# EAGLE board main (EAGLE 6.5.0)
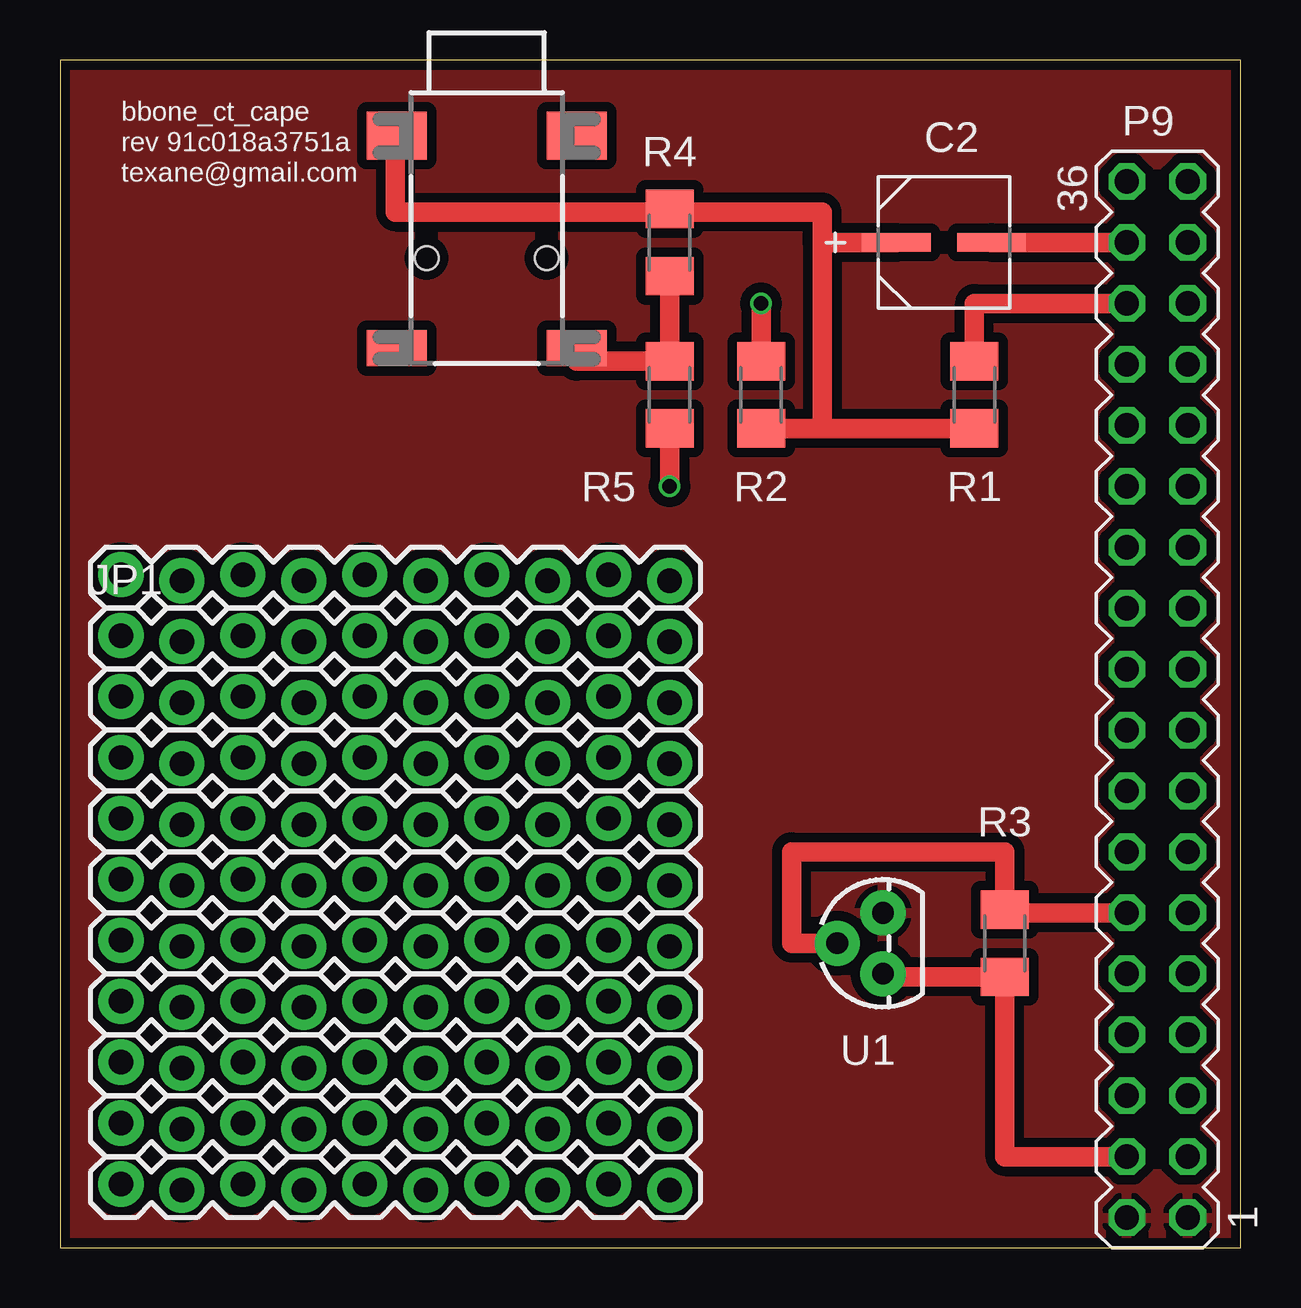
[diagram p0: board, top side]
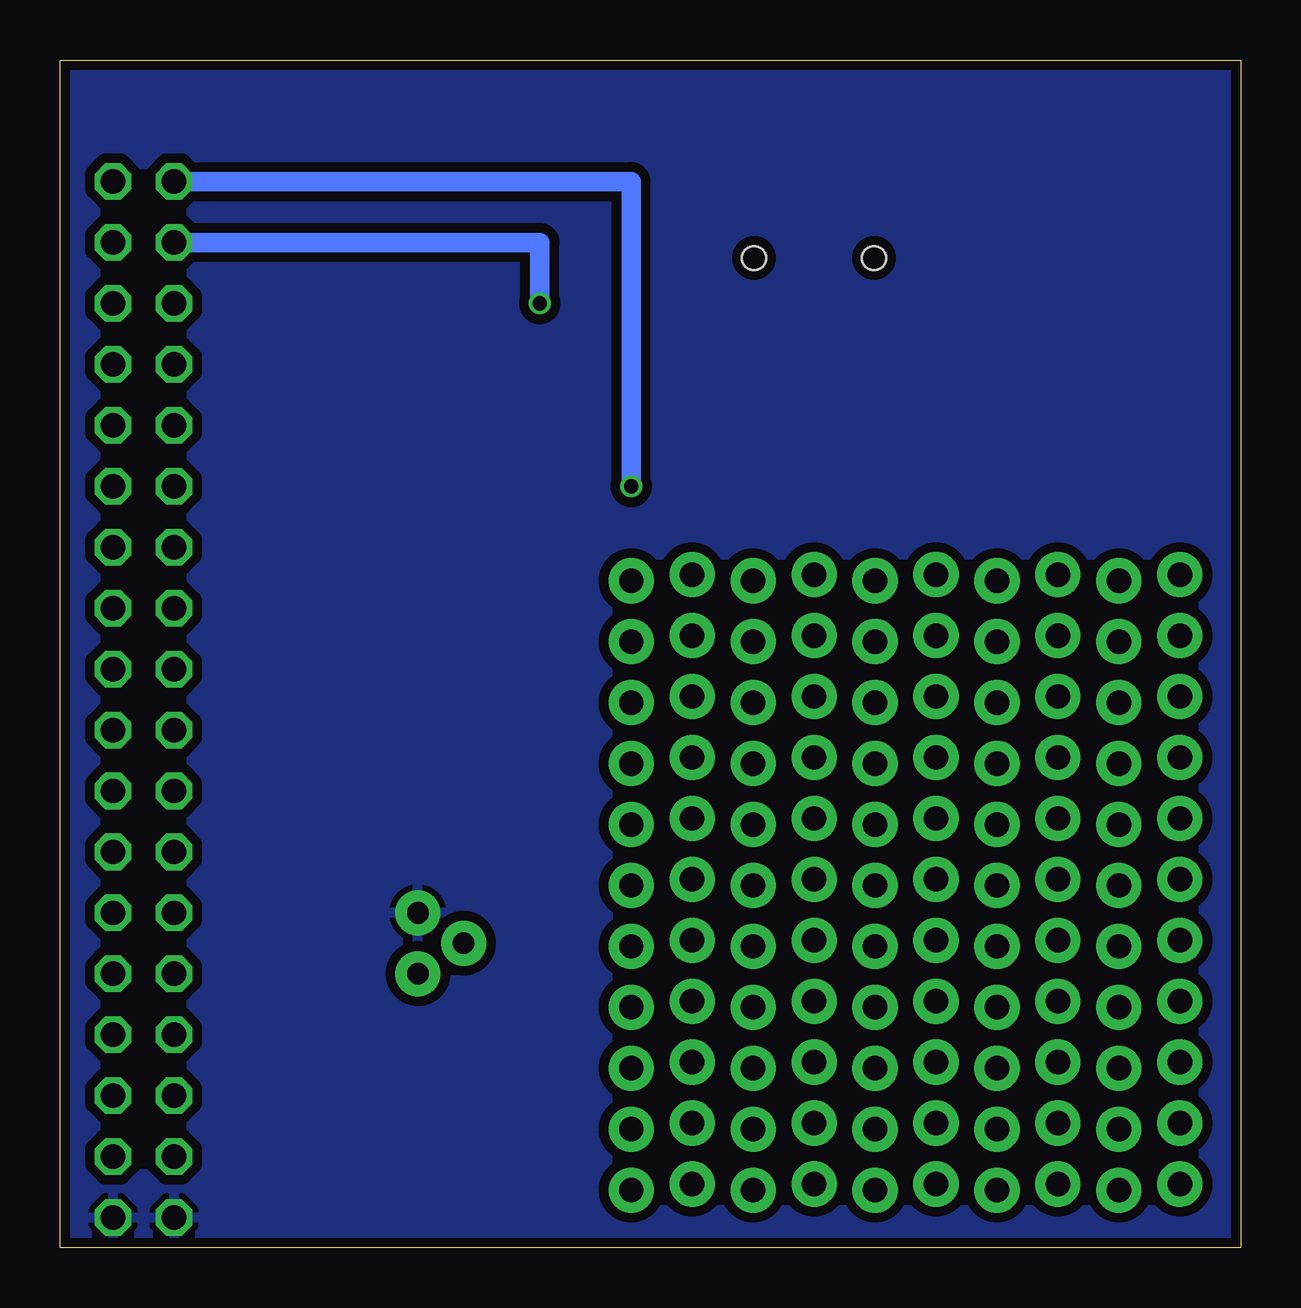
[diagram p1: board, bottom side, seen from below]

Size 49.2 x 49.52 mm. Coordinates in mm from the lower left corner, seen from the top.
Outline: 0,0 49.2,0 49.2,49.52 0,49.52 0,0
Copper layers (1*16): Top 0.035mm / dielectric 1.5mm / Bottom 0.035mm
Design rules "SeeedStudio_2layer_DRU_no_angle_20140221": minimum track width 6mil, minimum drill 12mil, track to track 6mil, track to pad 6mil, pad to pad 6mil, via to via 6mil, smd to smd 0mil, copper to edge 10mil, drill to drill 10mil, minimum pad ring 10mil, minimum via ring 6mil, stop-mask expansion 2mil, vias tented up to drill 100mil, thermal gap 10mil

## Footprints (pad centres in the part's own frame; a part is rotated, then mirrored left to right if it is on the bottom)
CAPAE530X610N = smd 2.87 x 0.762: 1 -1.981,0; 2 1.981,0
1X10_LOCK = drill 1.016 pad 1.88: 1 0,0.127; 2 2.54,-0.127; 3 5.08,0.127; 4 7.62,-0.127; 5 10.16,0.127; 6 12.7,-0.127; 7 15.24,0.127; 8 17.78,-0.127; 9 20.32,0.127; 10 22.86,-0.127
MA18-2 = drill 1.016 octagon: 1 -21.59,-1.27; 2 -21.59,1.27; 3 -19.05,-1.27; 4 -19.05,1.27; 5 -16.51,-1.27; 6 -16.51,1.27; 7 -13.97,-1.27; 8 -13.97,1.27; 9 -11.43,-1.27; 10 -11.43,1.27; 11 -8.89,-1.27; 12 -8.89,1.27; 13 -6.35,-1.27; 14 -6.35,1.27; 15 -3.81,-1.27; 16 -3.81,1.27; 17 -1.27,-1.27; 18 -1.27,1.27; 19 1.27,-1.27; 20 1.27,1.27; 21 3.81,-1.27; 22 3.81,1.27; 23 6.35,-1.27; 24 6.35,1.27; 25 8.89,-1.27; 26 8.89,1.27; 27 11.43,-1.27; 28 11.43,1.27; 29 13.97,-1.27; 30 13.97,1.27; 31 16.51,-1.27; 32 16.51,1.27; 33 19.05,-1.27; 34 19.05,1.27; 35 21.59,-1.27; 36 21.59,1.27
M1206 = smd 1.6 x 2: 1 -1.4,0; 2 1.4,0
TO-92-KIT = drill 0.9 pad 1.88: 1 -1.27,0; 2 0,1.905; 3 1.27,0
1503_02 = smd 2.5 x 1.5: 1 -3.75,-10.75; 3 3.75,-10.75 | smd 2.5 x 2: 2 -3.75,-1.9; 2@2 3.75,-1.9 | hole 1: -2.5,-7; 2.5,-7

## Placement (x,y rotation side)
C2  10UF  [CAPAE530X610N]  36.83,41.91 0 top
JP1  M10LOCK  [1X10_LOCK]  2.54,25.4 0 top
JP2  M10LOCK  [1X10_LOCK]  2.54,22.86 0 top
JP3  M10LOCK  [1X10_LOCK]  2.54,27.94 0 top
JP4  M10LOCK  [1X10_LOCK]  2.54,20.32 0 top
JP5  M10LOCK  [1X10_LOCK]  2.54,17.78 0 top
JP6  M10LOCK  [1X10_LOCK]  2.54,15.24 0 top
JP7  M10LOCK  [1X10_LOCK]  2.54,12.7 0 top
JP8  M10LOCK  [1X10_LOCK]  2.54,10.16 0 top
JP9  M10LOCK  [1X10_LOCK]  2.54,7.62 0 top
JP10  M10LOCK  [1X10_LOCK]  2.54,5.08 0 top
JP11  M10LOCK  [1X10_LOCK]  2.54,2.54 0 top
P9  [MA18-2]  45.72,22.86 90 top
R1  470K  [M1206]  38.1,35.56 90 top
R2  470K  [M1206]  29.21,35.56 270 top
R3  4.7K  [M1206]  39.37,12.7 270 top
R4  33  [M1206]  25.4,41.91 270 top
R5  1K  [M1206]  25.4,35.56 270 top
U1  [TO-92-KIT]  34.29,12.7 90 top
X1  1503_02  [1503_02]  17.78,48.26 0 top

## Library data of the parts
C2 = Panasonic-EEE0_EEE1_EEE2_EEEFC; MPN: EEE-1EA100SR; OC_FARNELL: 9696962; OC_NEWARK: 96K9429; PACKAGE: CASE-C; SUPPLIER: PANASONIC; TOLERANCE: 20%; VOLTAGERATING: 25V
JP1-JP11 U1 = SparkFun
P9 = con-lstb; OC_FARNELL: unknown; OC_NEWARK: unknown
R1-R5 = rcl
X1 = con-lumberg; OC_FARNELL: 1216979; OC_NEWARK: unknown

## Nets
AIN5: P9.36 R5.2
GND: P9.1 P9.2 U1.3
GNDA_ADC: C2.2 P9.34 R2.1
GPIO1_28: P9.12 R3.1 U1.2
N$1: C2.1 R1.1 R2.2 R4.1 X1.2
N$2: R4.2 R5.1 X1.3
VDD_3V3: P9.4 R3.2 U1.1
VDD_5V: P9.6
VDD_ADC: P9.32 R1.2

## Tracks (layer width: path | path; a pad name or v marks a point on that pad's centre or on a via)
AIN5  (via drill 0.6)
  Top 0.813: R5.2 v25.4,31.75
  Bottom 0.813: v25.4,31.75 25.4,44.45 P9.36
GND
  pour Top (isolate 0.406): 0,49.53 49.53,49.53 49.53,0 0,0
  pour Bottom (isolate 0.406): 0,49.53 49.53,49.53 49.53,0 0,0
GNDA_ADC  (via drill 0.6)
  Top 0.813: R2.1 v29.21,39.37 | C2.2 P9.34
  Bottom 0.813: v29.21,39.37 29.21,41.91 P9.34
GPIO1_28
  Top 0.813: U1.2 30.48,12.7 30.48,16.51 39.37,16.51 R3.1 39.37,13.97 P9.12
N$1
  Top 0.813: X1.2 13.97,46.36 13.97,43.18 25.4,43.18 | R1.1 31.75,34.16 | 31.75,34.16 R2.2 | C2.1 31.75,41.91 | 31.75,41.91 31.75,34.16 | 31.75,41.91 31.75,43.18 25.4,43.18 | 25.4,43.18 R4.1
N$2
  Top 0.813: R4.2 R5.1 21.53,36.96 X1.3
VDD_3V3
  Top 0.813: U1.1 34.29,11.3 R3.2 39.37,3.81 P9.4
VDD_ADC
  Top 0.813: R1.2 38.1,39.37 P9.32

## Text on the board
tNames: bbone_ct_cape | rev 91c018a3751a | texane@gmail.com